# Altium PCB 22_projet_groupe_partie_puissance_amelioree_VNH3SP30.PcbDoc
Units mil, origin at the board's own origin, x right, y up, seen from the top; angles counter-clockwise.
Board outline 2450 x 1950 mil, 4 copper layers (Top Layer, Internal Plane 1, Internal Plane 2, Bottom Layer); 18 components, 17 nets, 66 pads, 7 vias.
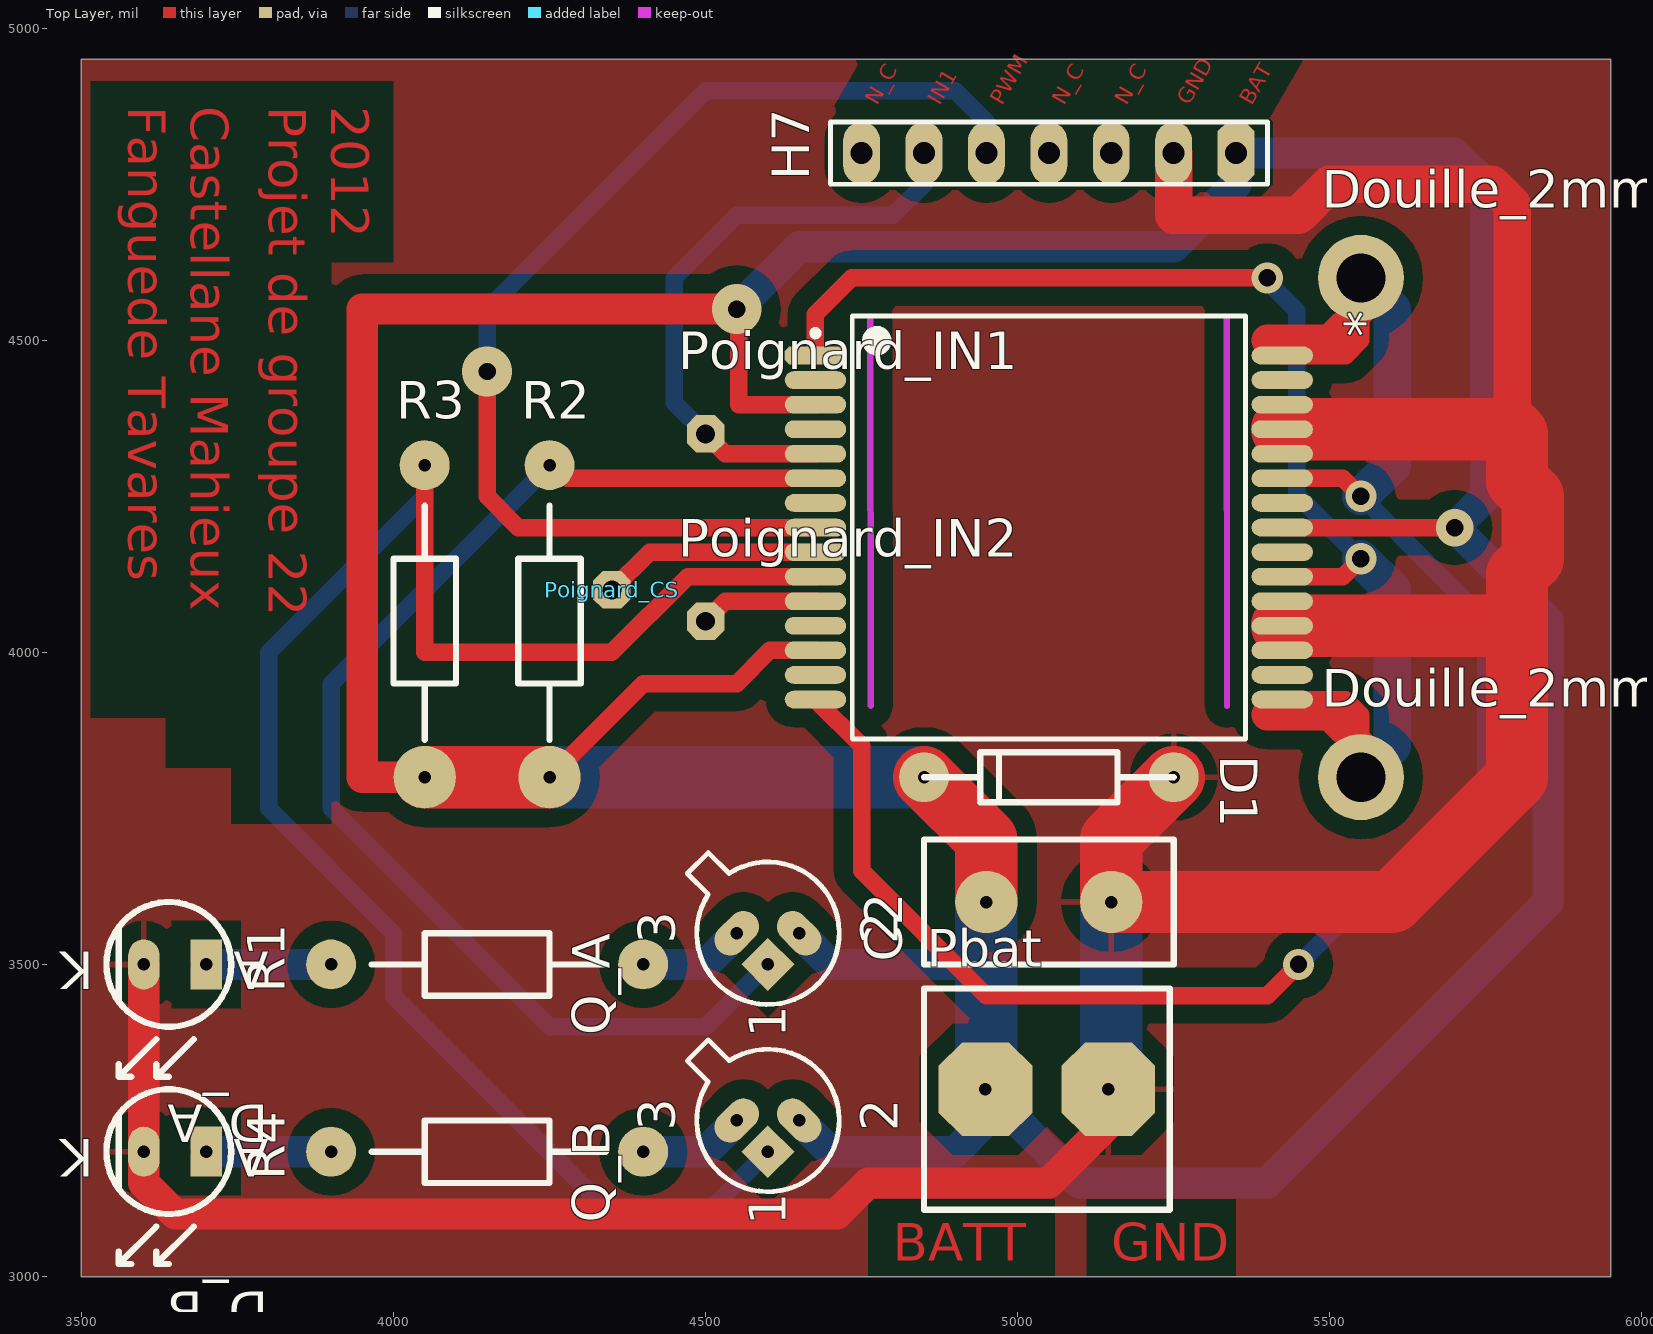
[diagram p0: Top Layer view]
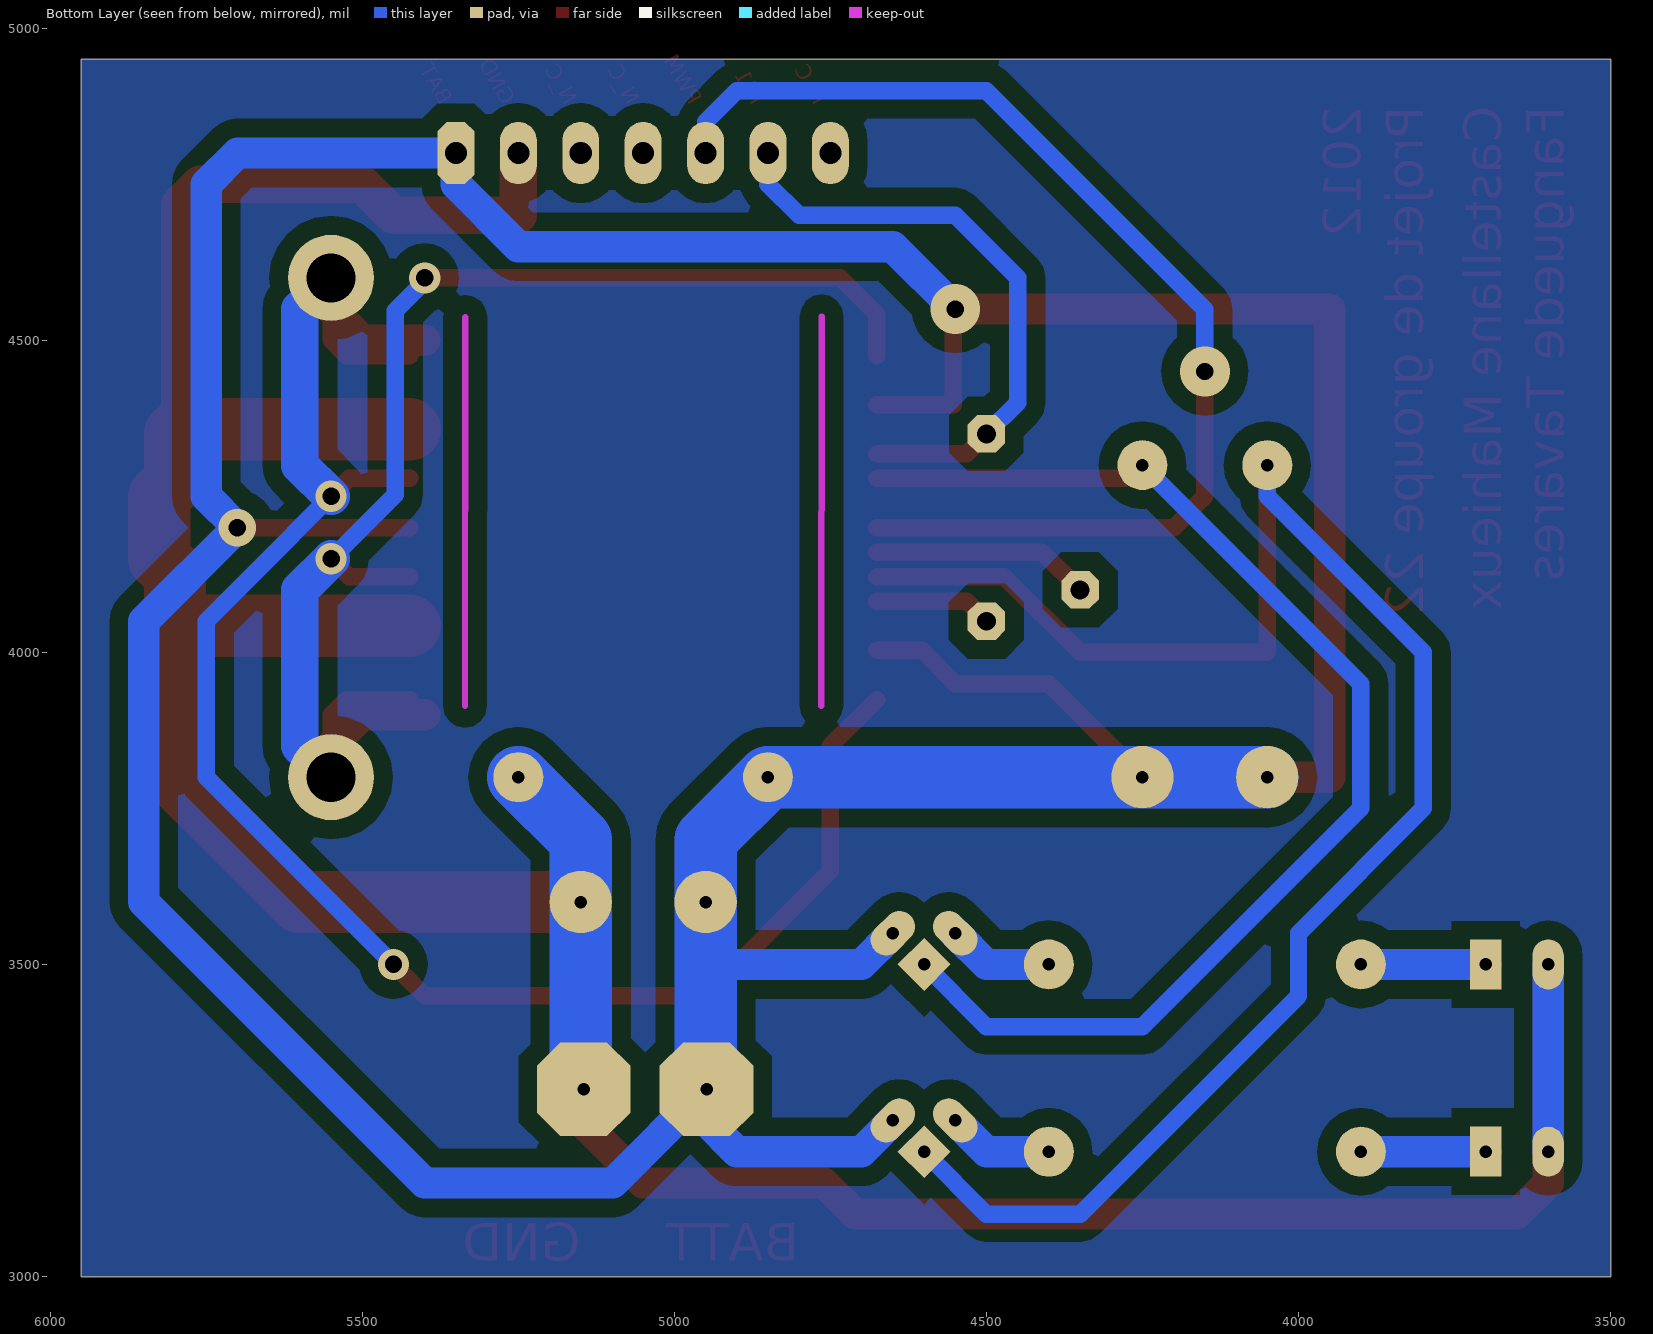
[diagram p1: Bottom Layer view, seen from below]
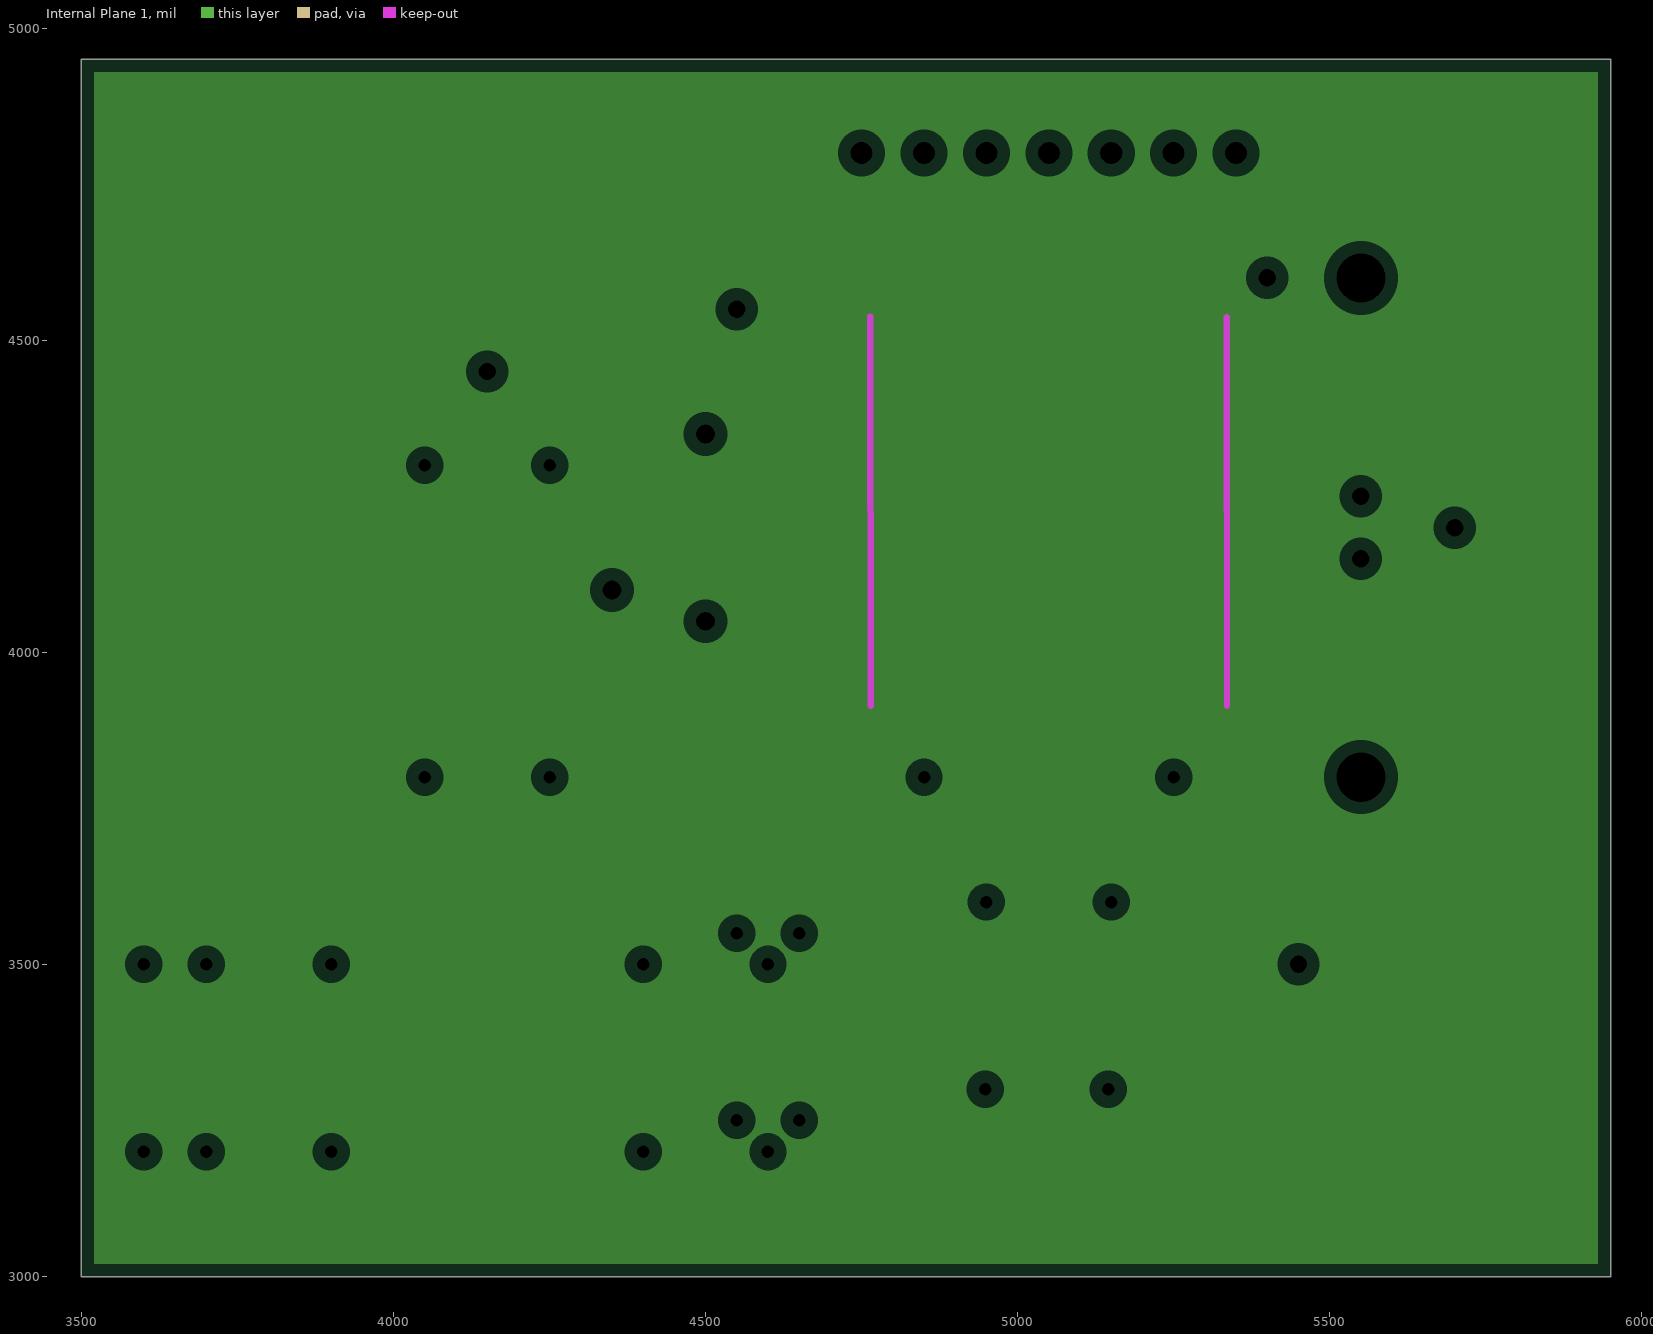
[diagram p2: Internal Plane 1, clearances drawn from the general rule]
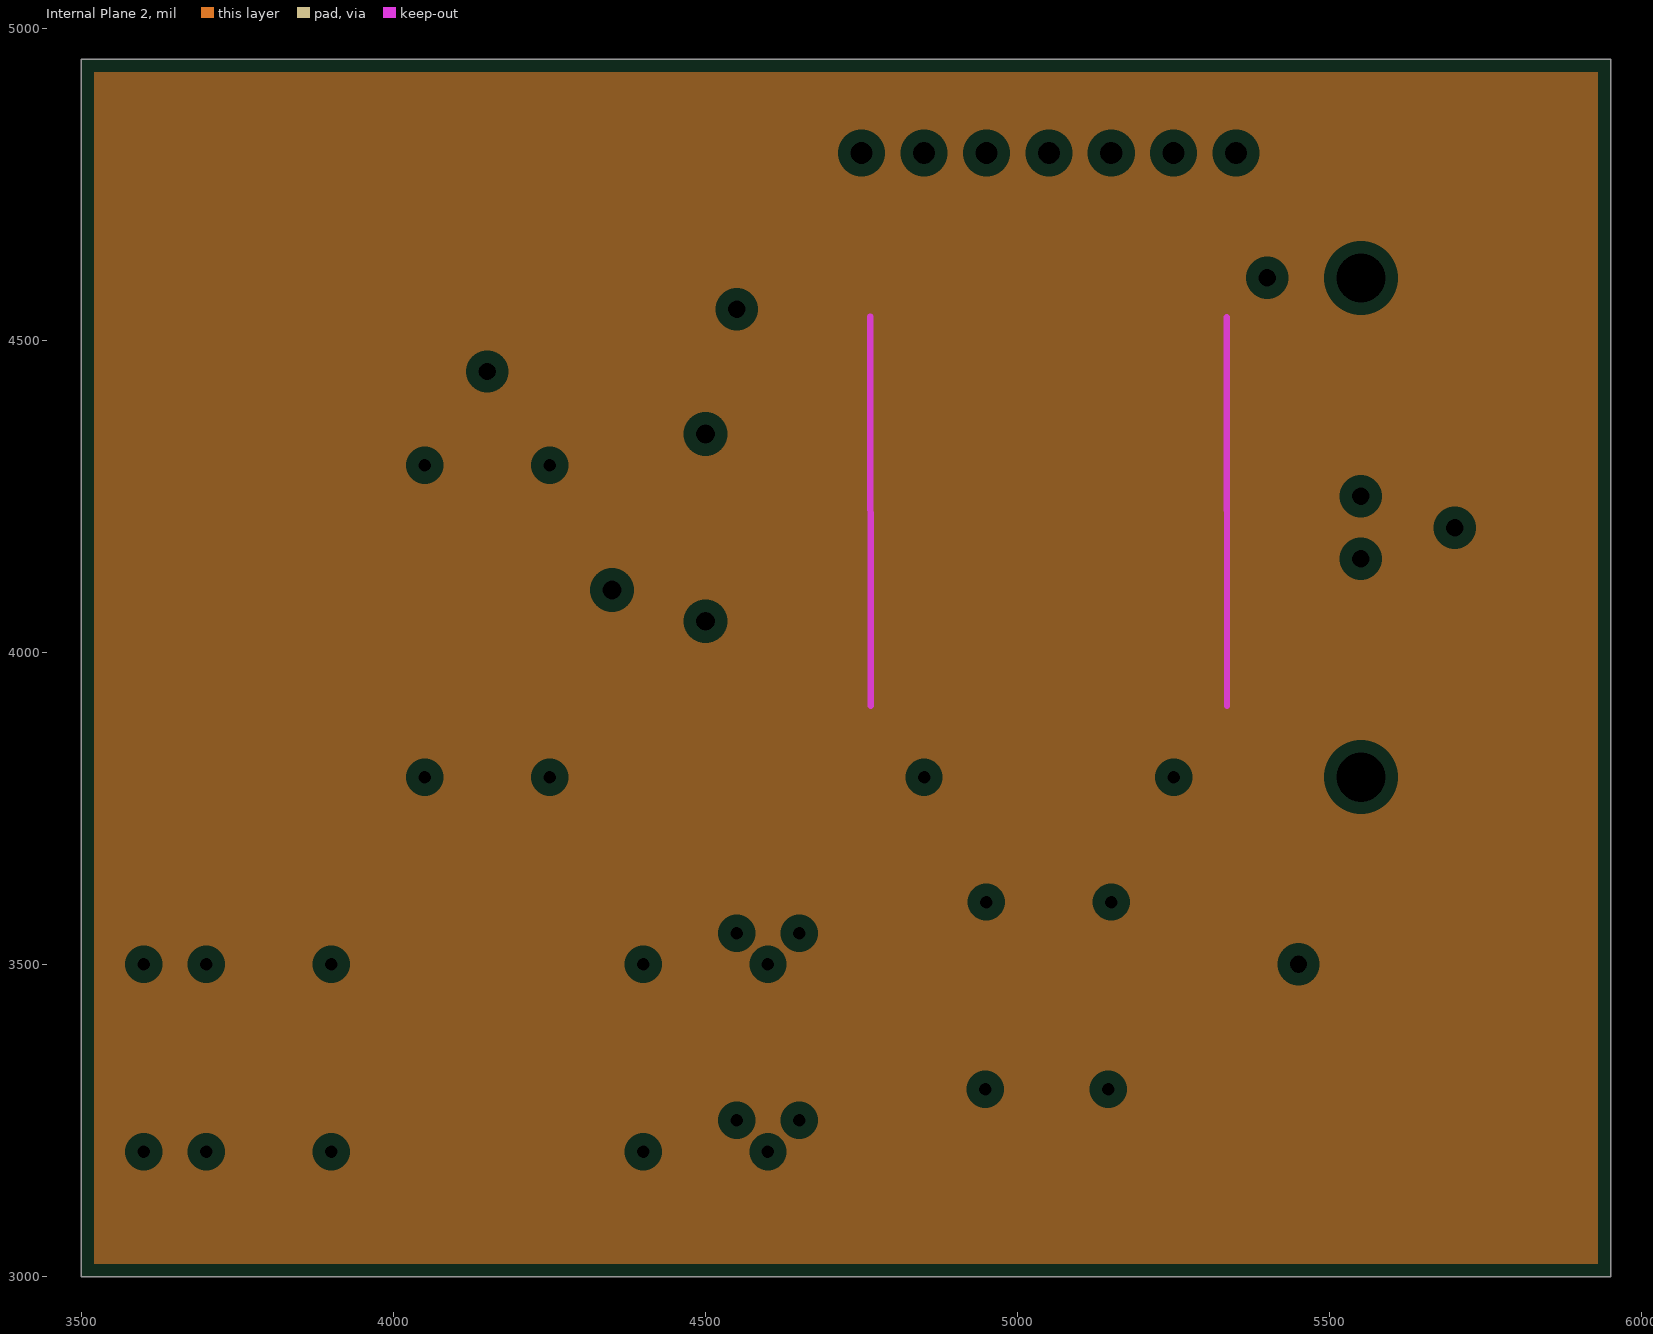
[diagram p3: Internal Plane 2, clearances drawn from the general rule]

## Layer stack, top to bottom
Top Layer: signal copper 1.4
Dielectric: dielectric 12.6, FR-4, Dk 4.8
Internal Plane 1: plane copper 1.4
Dielectric: dielectric 12.6, FR-4, Dk 4.8
Internal Plane 2: plane copper 1.4
Dielectric: dielectric 12.6, FR-4, Dk 4.8
Bottom Layer: signal copper 1.4

## Board outline
3500,4950 5950,4950 5950,3000 3500,3000

## Design rules (kind name [scope] priority, off if disabled: settings)
Clearance [All] p1: gap=11
FabricationTestPointUsage TestPointUsage [All] p1: valid=0 allowmultiple=FALSE
FabricationTestpoint Testpoint [All] p1: side=3 testpointundercomponent=TRUE minsize=40 maxsize=100 preferedsize=60 minholesize=0 maxholesize=40 preferedholesize=32 testpointgrid=1 allowsidetop=TRUE allowsidebottom=TRUE usegrid=TRUE gridtolerance=0.01
PlaneClearance [All] p1: clearance=20
PlaneConnect [All] p1: planeconnectstyle=Relief reliefexpansion=20 reliefentries=4 reliefconductorwidth=10 reliefairgap=10
PolygonConnect [All] p1: connectstyle=Relief reliefconductorwidth=10 reliefentries=4 polygonreliefangle="90 Angle"
RoutingLayers [All] p1: top layer_v5=FALSE bottom layer_v5=TRUE
RoutingVias [All] p1: holewidth=20 width=70 viastyle="Through Hole" minholewidth=28 minwidth=50 maxholewidth=28 maxwidth=50
SilkscreenOverComponentPads [All] p1: minsilkscreentomaskgap=10
SolderMaskExpansion [All] p1: expansion=4
Width [All] p1: maxlimit=120 minlimit=10 preferedwidth=28 minimp=50.000000 maximp=50.000000 favimp=50.000000
22 further rules are at their usual default settings.

## Components (designator, comment, footprint, x,y, rotation, side; value= is the part's Value field where it differs from the comment)
* "Component_1" MultiPowerSO-30 5050,4200 r0 top
C2 "Cap2" CAPA2 5150,3600 r180 top
D1 "Diode 1N4148" Ddiode 4850,3800 r0 top
D_A "Led" LED 3700,3500 r180 top
D_B "Led" LED 3700,3200 r180 top
Douille_2mm_A "douille_2mm" Douille-2mm 5550,3800 r90 top
Douille_2mm_B "douille_2mm" Douille-2mm 5550,4600 r90 top
H7 "Header 7" HDR1X7 5350,4800 r180 top
Pbat "Batterie" Bornier_2 4850,3300 r0 top
Poignard_CS "Poignard" Poignard 4350,4100 r90 top
Poignard_IN1 "Poignard" Poignard 4500,4350 r90 top
Poignard_IN2 "Poignard" Poignard 4500,4050 r90 top
Q_A "2N2222A" TO-18 4600,3550 r90 top
Q_B "2N2222A" TO-18 4600,3250 r90 top
R1 "Res2" res5_1/4W#1 4400,3500 r180 top
R2 "Res2" res5_1/4W#2 4250,3800 r90 top
R3 "Res2" res5_1/4W#2 4050,3800 r90 top
R4 "Res2" res5_1/4W#1 4400,3200 r180 top

## Footprints (in the part's own frame and the unit in brackets; to place one, negate y for a bottom-side part, rotate by r counter-clockwise, add the part's x,y. Pads: shape width x height; smd on the part's side, far side on the other; paste and mask are expansions set on the pad)
Bornier_2 [mil]
  oct 150x150 hole 20: 1(98.43,0) 2(295.28,0)
  silkscreen extent 0,-193 394,161
CAPA2 [mil]
  round 100 hole 20: 1(0,0) 2(200,0)
  silkscreen extent -100,-100 300,100
Ddiode [mil]
  round 80 hole 20: A(400,0) K(0,0)
  silkscreen extent 0,-40 400,40
Douille-2mm [mm]
  round 3.5 hole 2: 1(0,0)
HDR1X7 [mm] "Connector; Header; 7 Position"
  oct 1.5x2.54 hole 0.9: 1(0,0)
  oval 1.5x2.54 hole 0.9: 2(2.54,0) 3(5.08,0) 4(7.62,0) 5(10.16,0) 6(12.7,0) 7(15.24,0)
  silkscreen extent -1.27,-1.27 16.51,1.27
LED [mil]
  rect 50x80 hole 20: 1(0,0)
  oval 50x80 hole 20: 2(100,0)
  silkscreen extent -40,-100 160,180
MultiPowerSO-30 [mm] "MultiPowerSO-30, 30-Leads, Body 17.2x15.0mm (max), Pitch 1.00mm, IPC Medium Density"
  oct 2.5x0.72 smd: 1(-9.5,7)
  oval 2.5x0.72 smd: 2(-9.5,6) 3(-9.5,5) 4(-9.5,4) 5(-9.5,3) 6(-9.5,2) 7(-9.5,1) 8(-9.5,0) 9(-9.5,-1) 10(-9.5,-2) 11(-9.5,-3) 12(-9.5,-4) 13(-9.5,-5) 14(-9.5,-6) 15(-9.5,-7) 16(9.5,-7) 17(9.5,-6) 18(9.5,-5) 19(9.5,-4) 20(9.5,-3) 21(9.5,-2) 22(9.5,-1) 23(9.5,0) 24(9.5,1) 25(9.5,2) 26(9.5,3) 27(9.5,4) 28(9.5,5) 29(9.5,6) 30(9.5,7)
  Keep-Out Layer lines w0.254: -7.264,8.585 -7.25,-7.25 ; 7.239,8.56 7.25,-7.25
  silkscreen extent -9.62,-8.6 8,8.6, body extent -8,-8.6 8,8.6, height 2.35
Poignard [mil]
  oct 60x60 hole 30: 1(0,0)
res5_1/4W#1 [mil]
  round 80 hole 20: 1(0,0) 2(500,0)
  silkscreen extent 60,-50 435,50
res5_1/4W#2 [mil]
  round 100 hole 20: 1(0,0)
  round 80 hole 20: 2(500,0)
  silkscreen extent 60,-50 435,50
TO-18 [mil] "Can; 3 Leads; Pin Circle Dia. 2.54 mm; Lead Dia. 0.49 mm (max)"
  rect 60x60 hole 20 rot 45: 1(-50,0)
  oval 50x80 hole 20 rot 135: 2(0,-50)
  oval 50x80 hole 20 rot 45: 3(0,50)
  silkscreen extent -114,-114 129,129

## Part data
C2: "Capacitor"
D1: "High Conductance Fast Diode"
D_A D_B: "LED"
Douille_2mm_A Douille_2mm_B: "1-Pin"
H7: "Header, 7-Pin"
Pbat: library part Bornier_2, "Header, 2-Pin"
Q_A Q_B: "High Speed Switches"
R1 R2 R3 R4: "Resistor"

## Via types
v1: diameter 50, hole 28, Top Layer to Bottom Layer, 4 vias
v2: diameter 80, hole 28, Top Layer to Bottom Layer, 2 vias
v3: diameter 60, hole 28, Top Layer to Bottom Layer, 1 vias

## Nets (pads, with @x,y where several pads share a name; then routed paths per layer and width w, separated by ;. In a path a pad name is that pad's centre, name@x,y a point inside that pad or via, vN(x,y) a via of type N, cw(c..) or ccw(c..) an arc to the next point about the centre after c; other vN are vias at no path point)
EN: H7.3
GND: *.18 *.19 *.20 *.26 *.27 *.28 C2.1 D1.A D_A.2 D_B.2 H7.2 Pbat.2 | length 6210.2
  Top Layer w50: D_A.2 D_B.2 3600,3150 3650,3100 4710.02,3100 4760.02,3150 5050,3150 5145.28,3245.28 Pbat.2
  Top Layer w60: H7.2 5250,4700 5450,4700 5500,4750 5760.04,4750 5792.52,4717.52 5792.52,4357.48
  Top Layer w100: Pbat.2 Pbat.2@5150,3304.72 ; D1.A 5150,3700 C2.1 5600,3600 5800,3800 5800,4042.52 *.19 ; *.27 5792.52,4357.48 5800,4350 5800,4275 5825,4250 5825,4150 5800,4125 5800,4050
  Bottom Layer w50: D_B.2 D_A.2
  Bottom Layer w100: Pbat.2 5150,3304.72 C2.1 5150,3700 D1.A
IN1: *.5 H7.6 Poignard_IN1.1 | length 972
  Top Layer w28: Poignard_IN1.1 4531.89,4318.11 *.5
  Bottom Layer w28: Poignard_IN1.1 4450,4400 4450,4600 4550,4700 4800,4700 4850,4750 H7.6
IN2: *.11 Poignard_IN2.1 | length 189.2
  Top Layer w28: Poignard_IN2.1 4531.89,4081.89 *.11
Net*_1: *.1 *.16 *.21 Douille_2mm_A.1 | length 2262.9
  Top Layer w28: *.1 4675.98,4541.98 4734,4600 v1(5400,4600) ; *.16 5525.59,3924.41 5550,3900 5550,3850 Douille_2mm_A.1 ; *.21 5521.26,4121.26 v1(5550,4150)
  Top Layer w50: 5400,3900 5500,3900 Douille_2mm_A.1@5550,3850
  Bottom Layer w28: v1(5400,4600) 5400,4594.58 5447.29,4547.29 5447.29,4252.3 v1@5549.59,4150
  Bottom Layer w60: v1@5549.59,4150 v1(5550,4150) 5600,4100 5600,3850 Douille_2mm_A.1
Net*_6: *.6 Q_A.1 R2.2 | length 1978.6
  Top Layer w28: R2.2@4278.74,4278.74 *.6
  Bottom Layer w28: R2.2 3900,3950 3900,3750 4250,3400 4500,3400 Q_A.1
Net*_9: *.9 Poignard_CS.1 | length 351.1
  Top Layer w28: Poignard_CS.1 4410.63,4160.63 *.9
Net*_10: *.10 Q_B.1 R3.2 | length 2799
  Top Layer w28: R3.2 4050,4000 4350,4000 4471.26,4121.26 *.10
  Bottom Layer w28: R3.2 4050,4250 3800,4000 3800,3750 4000,3550 4000,3450 4350,3100 4500,3100 Q_B.1
Net*_15: *.15 *.25 *.30 Douille_2mm_B.1 | length 3002.1
  Top Layer w28: *.15 4750,3850.39 4750,3650 4950,3450 5400,3450 v1(5450,3500) ; *.25 5521.26,4278.74 v1(5550,4250) ; *.30 5525.59,4475.59 5550,4500 5550,4550 Douille_2mm_B.1
  Top Layer w50: 5400,4500 5500,4500 Douille_2mm_B.1@5550,4550
  Bottom Layer w28: v1(5450,3500) 5750,3800 5750,4050 5671,4129 5671,4129.41 v1@5550.41,4250
  Bottom Layer w60: Douille_2mm_B.1 5600,4550 5600,4300 v1(5550,4250) v1@5550.41,4250
NetD_A_1: D_A.1 R1.2 | length 200
  Bottom Layer w50: D_A.1 R1.2
NetD_B_1: D_B.1 R4.2 | length 200
  Bottom Layer w50: D_B.1 R4.2
NetQ_A_3: Q_A.3 R1.1 | length 170.7
  Bottom Layer w50: R1.1 4500,3500 Q_A.3
NetQ_B_3: Q_B.3 R4.1 | length 170.7
  Bottom Layer w50: R4.1 4500,3200 Q_B.3
PWM: *.8 H7.5 | length 1862.4
  Top Layer w28: v2(4150,4450) 4150,4250 4200,4200 *.8
  Bottom Layer w28: v2(4150,4450) 4150,4550 4500,4900 4900,4900 4950,4850 H7.5
SENSE: H7.7
V_5V_FPT: H7.4
V_BATT: *.3 *.13 *.23 C2.2 D1.K H7.1 Pbat.1 Q_A.2 Q_B.2 R2.1 R3.1 | length 8747.1
  Top Layer w28: R2.1 4400,3950 4550,3950 4603.15,4003.15 *.13 ; v2(4550,4550) 4553.15,4546.85 4553.15,4396.85 *.3 ; *.23 v3(5700,4200)
  Top Layer w50: R3.1 3950,3800 3950,4550 v2(4550,4550)
  Top Layer w100: R3.1 R2.1 ; D1.K 4950,3700 C2.2 ; Pbat.1 Pbat.1@4950,3301.57
  Bottom Layer w50: v2(4550,4550) 4650,4650 5250,4650 5350,4750 H7.1 5700,4800 5750,4750 5750,4250 v3(5700,4200) 5850,4050 5850,3600 5400,3150 5098.43,3150 Pbat.1 4948.43,3248.43 4900,3200 4700,3200 Q_B.2 ; Q_A.2 4700,3500 4950,3500
  Bottom Layer w100: R3.1 R2.1 D1.K 4950,3700 C2.2 4950,3500 4950,3301.57 Pbat.1
pads on no net: *.2 *.4 *.7 *.12 *.14 *.17 *.22 *.24 *.29

## Polygon pours and split planes (outlines as drawn)
GND on Top Layer "Bottom Layer-GND" (solid, remove dead copper, pour order 2): 5950,3000 5950,4950 3500,4950 3500,3000
no net on Bottom Layer "Bottom Layer-GND" (solid, pour order 5): 5950,3000 5950,4950 3500,4950 3500,3000
no net on Internal Plane 1 (split plane): 5929.9,3020.1 3520.1,3020.1 3520.1,4929.9 5929.9,4929.9
no net on Internal Plane 2 (split plane): 5929.9,3020.1 3520.1,3020.1 3520.1,4929.9 5929.9,4929.9

## Other copper
Top Layer:
  text "Fanguede Tavares" at 3575,4875 h60 r270
  text "Castellane Mahieux" at 3675,4875 h60 r270
  text "Projet de groupe 22" at 3800,4875 h60 r270
  text "2012" at 3900,4875 h60 r270
  text "N_C" at 4775,4875 h25 r60
  text "IN1" at 4875,4875 h25 r60
  text "PWM" at 4975,4875 h25 r60
  text "N_C" at 5075,4875 h25 r60
  text "N_C" at 5175,4875 h25 r60
  text "GND" at 5275,4875 h25 r60
  text "BAT" at 5375,4875 h25 r60
  text "BATT" at 4800,3025 h60
  text "GND" at 5150,3025 h60

## Text inside footprints (layer, text, board x,y; h text height)
D_A: Top Overlay "A" at 3800,3520 h60 r180; Top Overlay "K" at 3520,3520 h60 r180
D_B: Top Overlay "A" at 3800,3220 h60 r180; Top Overlay "K" at 3520,3220 h60 r180
Q_A: Top Overlay "3" at 4451.5,3533.5 h59.05 r90; Top Overlay "2" at 4808.31,3532.56 h59.05 r90; Top Overlay "1" at 4628.27,3382.2 h59.05 r90
Q_B: Top Overlay "3" at 4451.5,3233.5 h59.05 r90; Top Overlay "2" at 4808.31,3232.56 h59.05 r90; Top Overlay "1" at 4628.27,3082.2 h59.05 r90